# Altium PCB Sensor_PCB.PcbDoc
Units mil, origin at the board's own origin, x right, y up, seen from the top; angles counter-clockwise.
Board outline 6200 x 6200 mil, 2 copper layers (Top Layer, Bottom Layer); 26 components, 17 nets, 100 pads, 228 vias.
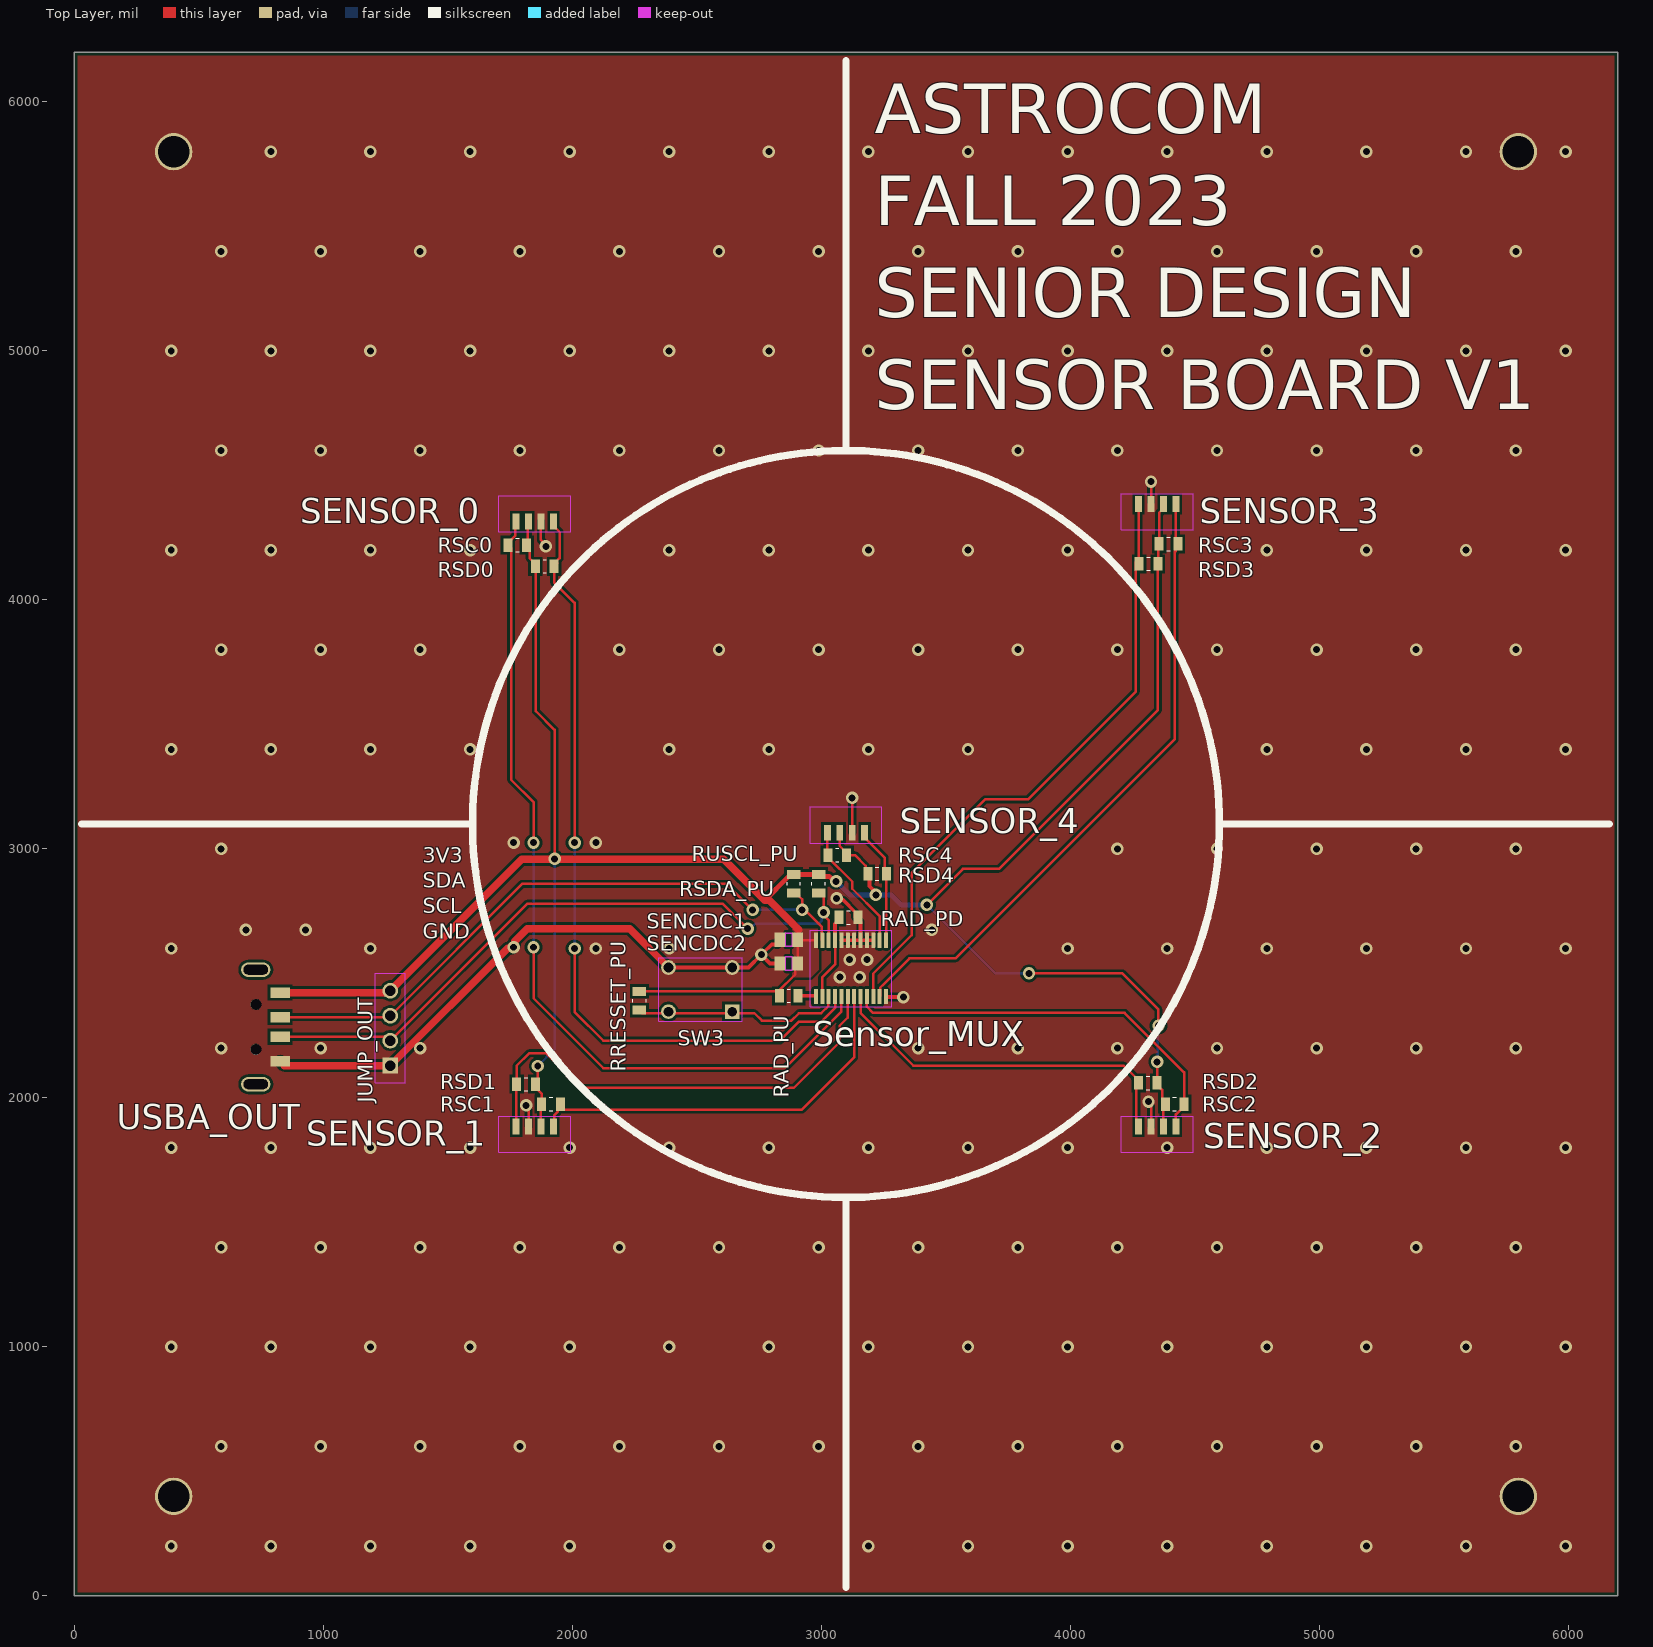
[diagram p0: Top Layer view]
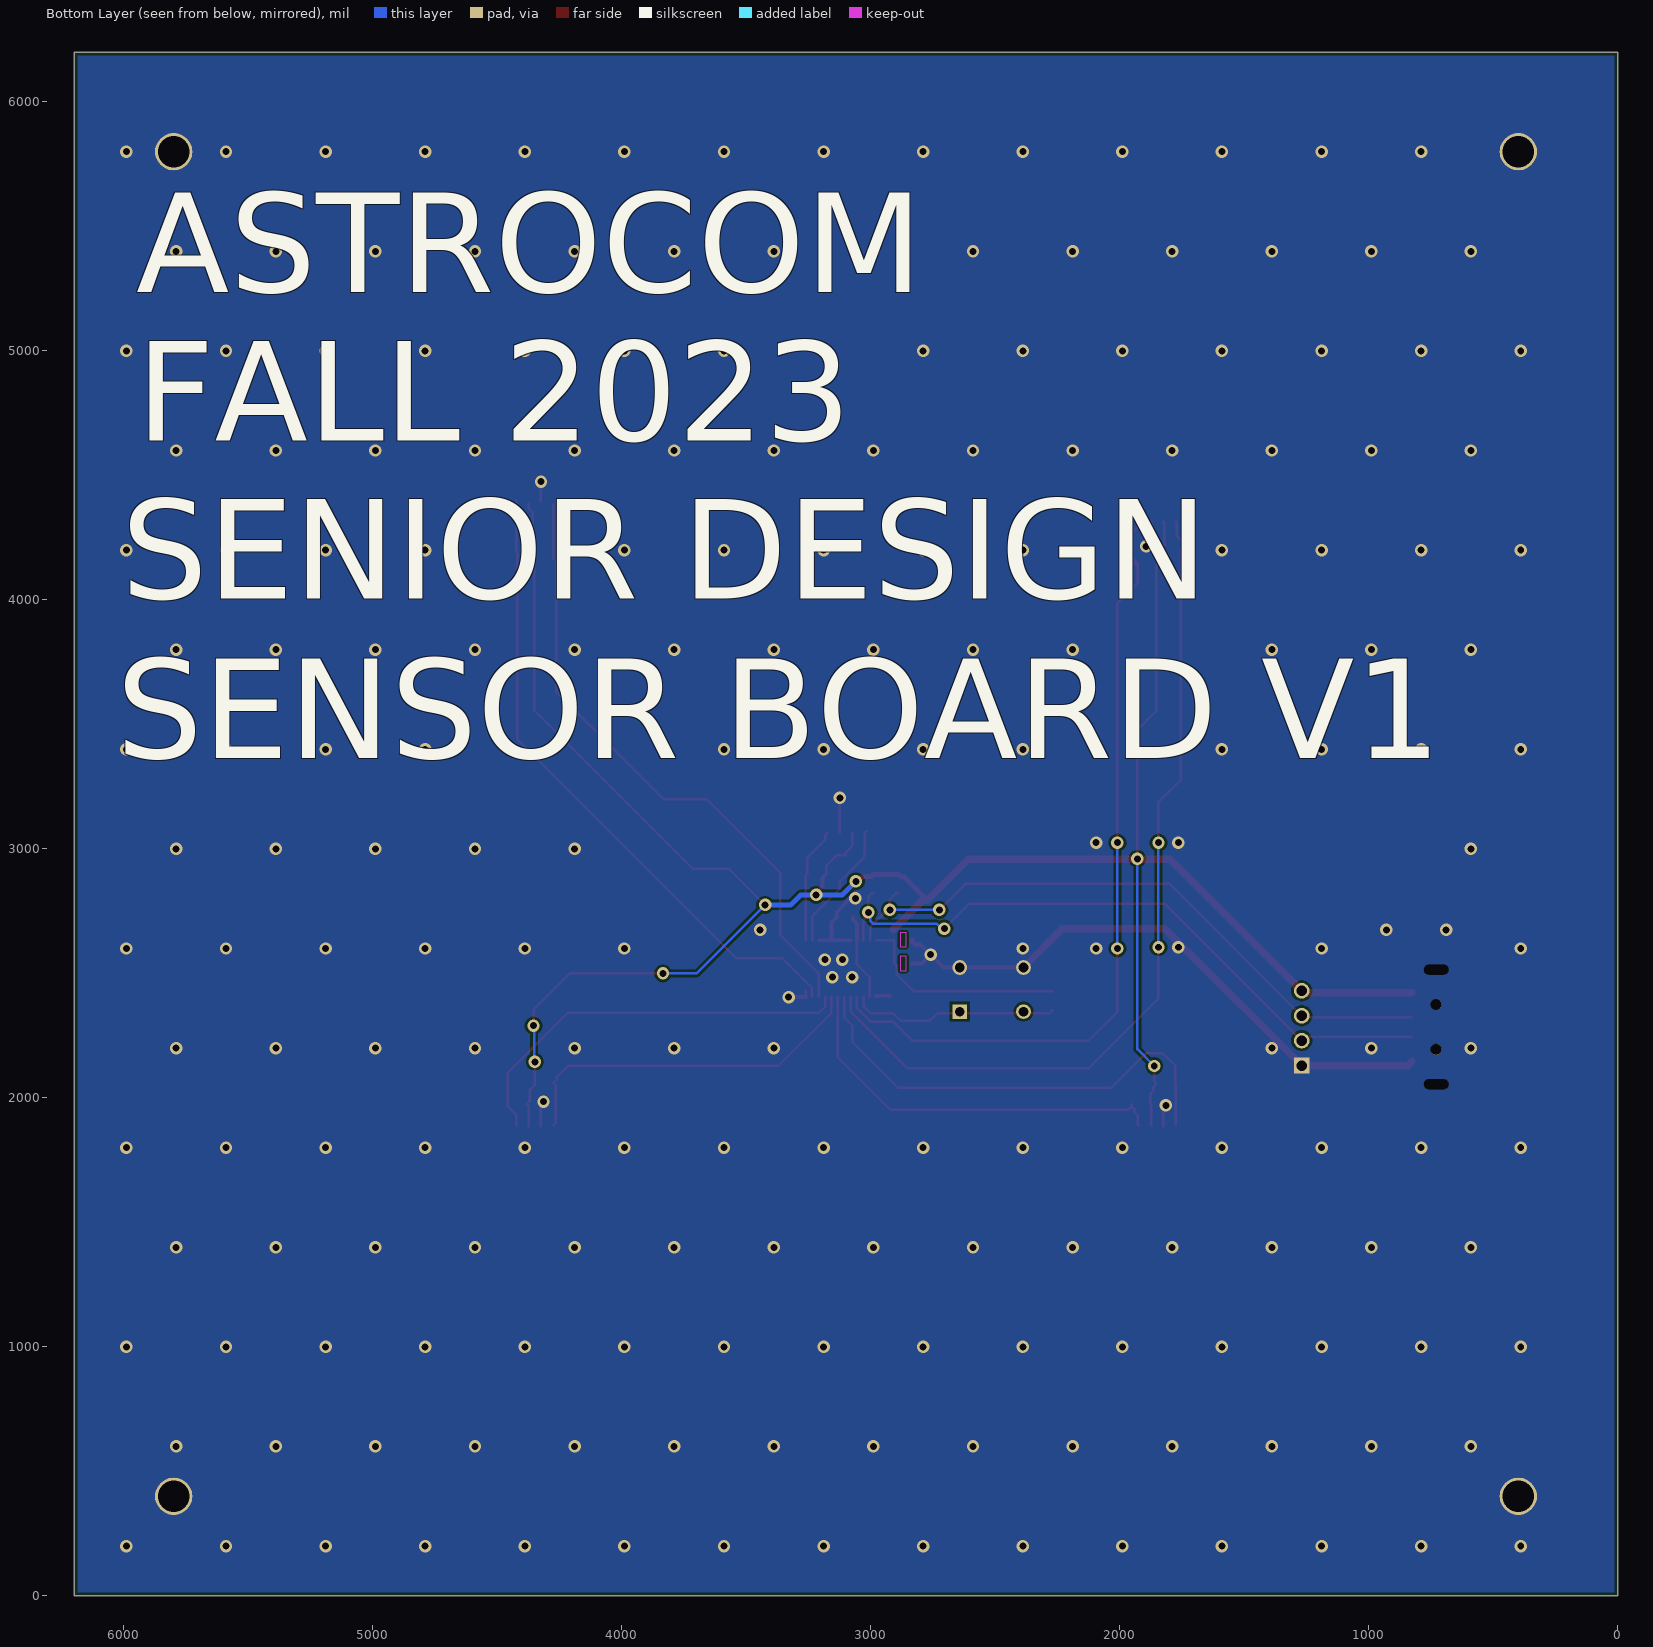
[diagram p1: Bottom Layer view, seen from below]
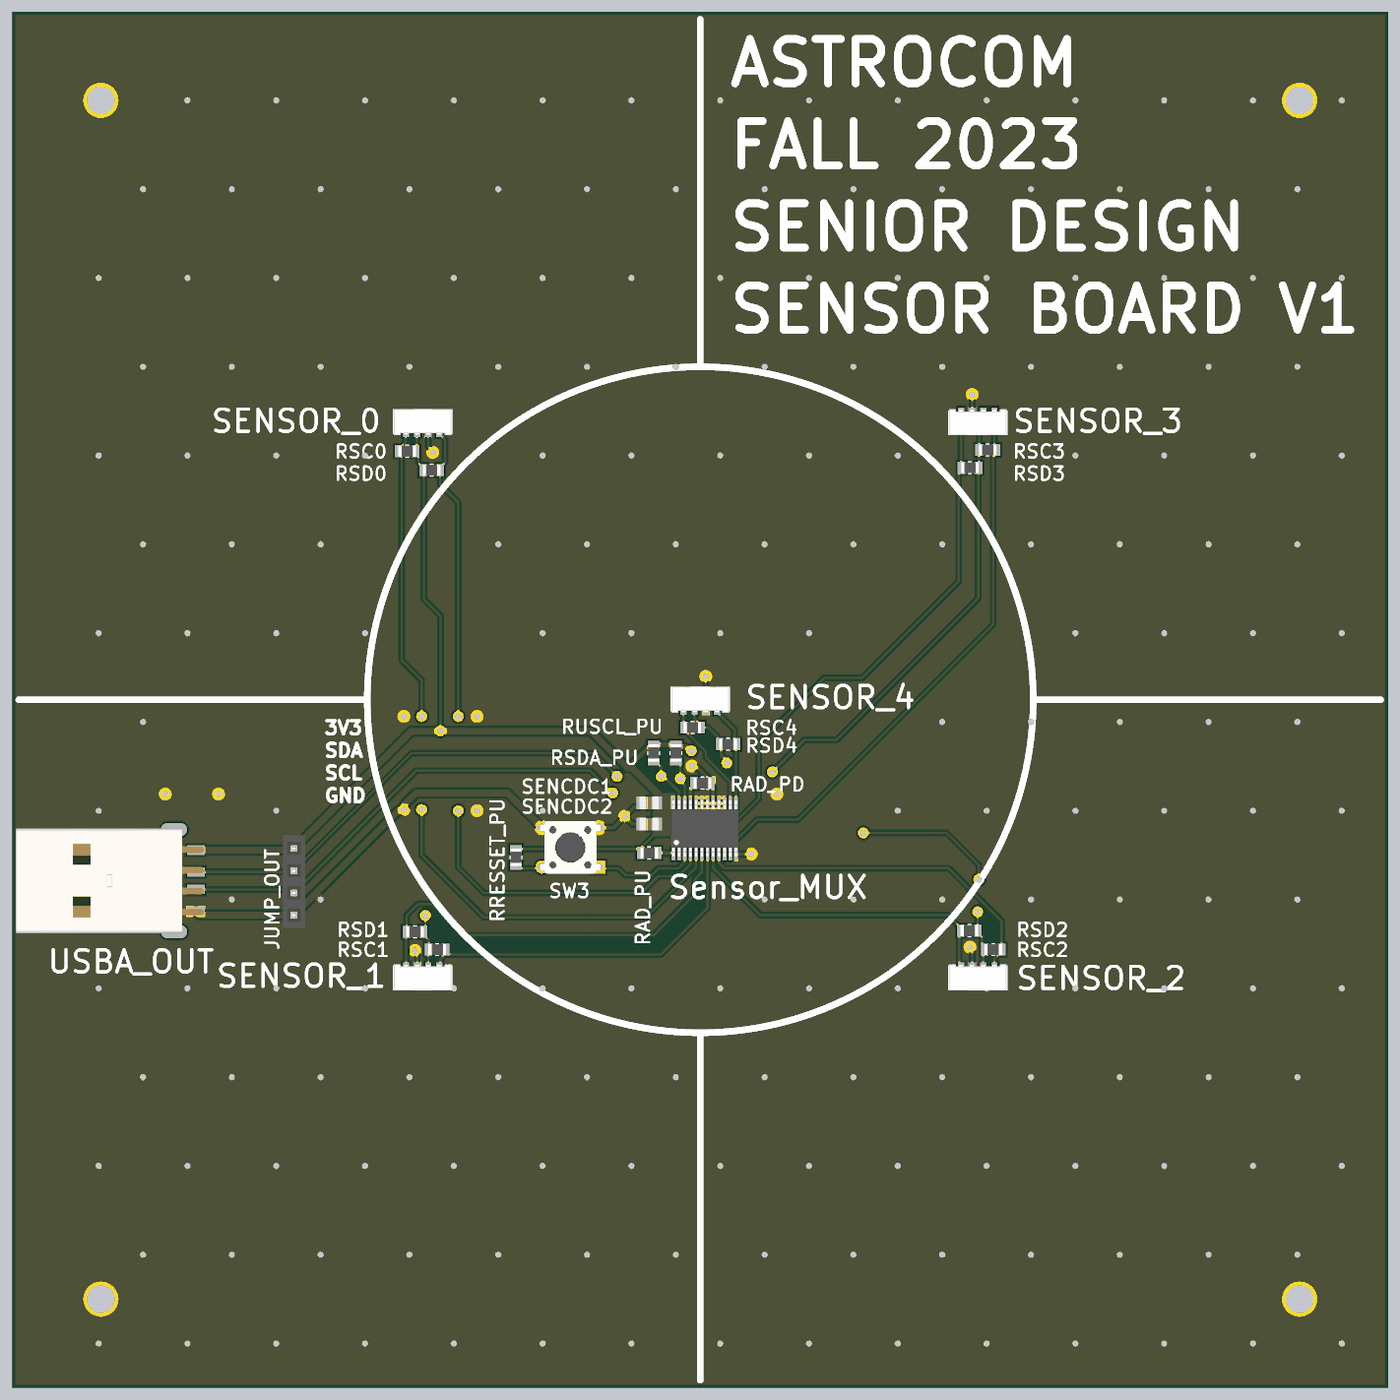
[diagram p2: 3D render of the assembled board from above, using the file's embedded part models]

## Layer stack, top to bottom
Top Solder: solder mask 0.4, Solder Resist, Dk 3.5
Top Layer: signal copper 1.4
Dielectric 1: dielectric 12.6, FR-4, Dk 4.8
Bottom Layer: signal copper 1.4
Bottom Solder: solder mask 0.4, Solder Resist, Dk 3.5

## Board outline
0,0 0,6200 6200,6200 6200,0

## Design rules (kind name [scope] priority, off if disabled: settings)
BoardOutlineClearance [All] p1: gap=10 ignorepadtopadclearanceinfootprint=FALSE except(0: Arc-SplitContinuation Track-SplitContinuation SMDPad-SplitContinuation THPad-SplitContinuation Via-SplitContinuation Fill-SplitContinuation Poly-SplitContinuation Region-SplitContinuation Text-SplitContinuation; 15: Poly-OutlineEdge Poly-CavityEdge Poly-CutoutEdge Poly-SplitBarrior)
Clearance Clearance_1 [All] p1: gap=10 ignorepadtopadclearanceinfootprint=FALSE except(0: Arc-Hole Track-Hole SMDPad-Hole THPad-Hole Via-Hole Fill-Hole Poly-Hole Region-Hole Text-Hole)
Clearance [All] p2: gap=10 ignorepadtopadclearanceinfootprint=FALSE except(0: Arc-Hole Track-Hole SMDPad-Hole THPad-Hole Via-Hole Fill-Hole Poly-Hole Region-Hole Text-Hole)
HoleSize [All] p1: absolutevalues=TRUE maxlimit=200 minlimit=1 maxpercent=80.000 minpercent=20.000
PolygonConnect [All] p1: connectstyle=Direct reliefconductorwidth=10 reliefentries=4 polygonreliefangle="90 Angle" airgapwidth=10
RoutingVias [All] p1: holewidth=28 width=50 viastyle="Through Hole" minholewidth=28 minwidth=50 maxholewidth=28 maxwidth=50
SolderMaskExpansion [All] p1: expansion=4 istentingtop=FALSE
Width [All] p1: maxlimit=30 minlimit=6 preferedwidth=10 minimp=50.000000 maximp=50.000000 favimp=50.000000
29 further rules are at their usual default settings.

## Components (designator, comment, footprint, x,y, rotation, side; value= is the part's Value field where it differs from the comment)
JUMP_OUT "PPTC041LFBN-RC" SULLINS_PPTC041LFBN-RC 1270,2280 r90 top
RAD_PD "2.2k Ohms" RESC2012X60N 3110,2725 r180 top
RAD_PU "2.2k Ohms" RESC2012X60N 2870,2410 r180 top
RRESSET_PU "2.2k Ohms" RESC2012X60N 2270,2390 r90 top
RSC0 "2.2k Ohms" RESC2012X60N 1780,4220 r0 top
RSC1 "2.2k Ohms" RESC2012X60N 1915,1975 r180 top
RSC2 "2.2k Ohms" RESC2012X60N 4420,1975 r180 top
RSC3 "2.2k Ohms" RESC2012X60N 4395,4225 r180 top
RSC4 "2.2k Ohms" RESC2012X60N 3065,2975 r0 top
RSD0 "2.2k Ohms" RESC2012X60N 1890,4135 r180 top
RSD1 "2.2k Ohms" RESC2012X60N 1815,2055 r0 top
RSD2 "2.2k Ohms" RESC2012X60N 4312.4,2060 r0 top
RSD3 "2.2k Ohms" RESC2012X60N 4315,4145 r0 top
RSD4 "2.2k Ohms" RESC2012X60N 3225,2900 r180 top
RSDA_PU "2.2k Ohms" RESC2012X60N 2890,2860 r90 top
RUSCL_PU "2.2k Ohms" RESC2012X60N 2990,2860 r90 top
SENCDC1 "200pF" CAP_CC0805_YAG 2870,2635 r0 top
SENCDC2 "200pF" CAP_CC0805_YAG 2870,2540 r0 top
SENSOR_0 "VEML7700-TT" XDCR_VEML7700-TT 1850,4350 r90 top
SENSOR_1 "VEML7700-TT" XDCR_VEML7700-TT 1850,1850 r270 top
SENSOR_2 "VEML7700-TT" XDCR_VEML7700-TT 4350,1850 r270 top
SENSOR_3 "VEML7700-TT" XDCR_VEML7700-TT 4350,4350 r270 top
SENSOR_4 "VEML7700-TT" XDCR_VEML7700-TT 3100,3100 r90 top
Sensor_MUX "TCA9548APWR" SOP65P640X120-24N 3120,2520 r90 top
SW3 "1825910-6" SW_1825910-6-4 2515,2435 r180 top
USBA_OUT "USB-AP-S-RA-SMT" CONN_USB-AP-S-RA-SMT_ADM 440,2285 r270 top

## Footprints (in the part's own frame and the unit in brackets; to place one, negate y for a bottom-side part, rotate by r counter-clockwise, add the part's x,y. Pads: shape width x height; smd on the part's side, far side on the other; paste and mask are expansions set on the pad)
CAP_CC0805_YAG [mil]
  rect 44x57 smd paste+0 mask+0: 1(-35.31,0) 2(35.31,0)
  Top Layer keep-out region: -11.31,-26.5 -11.31,26.5 11.31,26.5 11.31,-26.5
  Keep-Out Layer region: -11.31,-28.5 -11.31,28.5 11.31,28.5 11.31,-28.5
  body extent -43,-29 43,29, height 57
CONN_USB-AP-S-RA-SMT_ADM [mil]
  rect 43x79 smd: 1(-137.8,387.5) 2(-39.37,387.5) 3(39.37,387.5) 4(137.8,387.5)
  round 43 hole 43: 5(-90,290) 6(90,290)
  rrect100% 59x118 smd: 7(-230,289.5) 8(230,289.5)
  round 39 hole 39 slot 98 at 90 deg: S_1_H1(-230,289.5) S_2_H1(230,289.5)
  body extent -245,-422 245,425, height 176
RESC2012X60N [mm]
  rect 0.92x1.38 smd: 1(-0.955,0) 2(0.955,0)
  silkscreen extent -0.17,-0.68 0.17,0.68, body extent -1,-0.63 1,0.63, height 0.6
SOP65P640X120-24N [mil]
  rrect25% 61.81x16.14 smd: 1(-112.99,140.75) 2(-112.99,115.16) 3(-112.99,89.57) 4(-112.99,63.98) 5(-112.99,38.39) 6(-112.99,12.8) 7(-112.99,-12.8) 8(-112.99,-38.39) 9(-112.99,-63.98) 10(-112.99,-89.57) 11(-112.99,-115.16) 12(-112.99,-140.75) 13(112.99,-140.75) 14(112.99,-115.16) 15(112.99,-89.57) 16(112.99,-63.98) 17(112.99,-38.39) 18(112.99,-12.8) 19(112.99,12.8) 20(112.99,38.39) 21(112.99,63.98) 22(112.99,89.57) 23(112.99,115.16) 24(112.99,140.75)
  Top Layer keep-out lines w1.97: -153.74,163.39 153.74,163.39 153.74,-163.39 -153.74,-163.39 -153.74,163.39
  body extent -126,-154 126,154, height 47
SULLINS_PPTC041LFBN-RC [mil]
  rect 63.2x63.2 / inner round 58.38 / far side rect 63.2x63.2 hole 42.13: 1(-150,0)
  round 63.2 hole 42.13: 2(-50,0) 3(50,0) 4(150,0)
  Top Layer keep-out lines w1.97: -219.69,59.84 -219.69,-59.84 219.69,-59.84 219.69,59.84 -219.69,59.84
  body extent -210,-50 210,50, height 335
SW_1825910-6-4 [mil]
  rect 58.98x58.98 / inner round 54.49 / far side rect 58.98x58.98 hole 38.98: 1(-127.95,88.58)
  round 58.98 hole 38.98: 2(127.95,88.58) 3(-127.95,-88.58) 4(127.95,-88.58)
  Top Layer keep-out lines w1.97: 167.32,127.95 -167.32,127.95 -167.32,-127.95 167.32,-127.95 167.32,127.95
  body extent -153,-118 154,118, height 197
XDCR_VEML7700-TT [mil]
  rect 62.99x27.56 smd: 1(-35.43,75) 2(-35.43,25) 3(-35.43,-25) 4(-35.43,-75)
  Top Layer keep-out lines w1.97: -76.77,143.7 -76.77,-143.7 68.9,-143.7 68.9,143.7 -76.77,143.7
  body extent -59,-134 59,134, height 92

## Part data
JUMP_OUT: "4 Position Header Connector Through Hole  Check availability", PACKAGE=None, AVAILABILITY="In Stock", CHECK_PRICES=https://www.snapeda.com/parts/PPTC041LFBN-RC/Sullins+Connector+Solutions/view-part/?ref=eda, DeviceSetName=PPTC041LFBN-RC, GateName_1=G$1, LibraryName=PPTC041LFBN-RC, MF="Sullins Connector", MP=PPTC041LFBN-RC, PRICE=None, PURCHASE-URL="https://www.snapeda.com/api/url_track_click_mouser/?unipart_id=285917&manufacturer=Sullins Connector&part_name=PPTC041LFBN-RC&search_term=pptc041lfbn-rc", SNAPEDA_LINK=https://www.snapeda.com/parts/PPTC041LFBN-RC/Sullins+Connector+Solutions/view-part/?ref=snap, SymbolName_1=PPTC041LFBN-RC
RAD_PD RAD_PU RRESSET_PU RSC0 RSC1 RSC2 RSC3 RSC4 RSD0 RSD1 RSD2 RSD3 RSD4 RSDA_PU RUSCL_PU: library part AC0805FR-072K2L, "RES SMD 2.2K OHM 1% 1/8W 0805", PACKAGE=None, AVAILABILITY=Unavailable, MP=AC0805FR-072K2L, PRICE=None
SENCDC1 SENCDC2: library part CC0805KRX7R9BB201, "CAP CER 200PF 50V X7R 0805", MFR_NAME=Yageo, COPYRIGHT="Copyright (C) 2023 Ultra Librarian. All rights reserved.", MANUFACTURER_PART_NUMBER=CC0805KRX7R9BB201, RefDes=RefDes, TYPE=DEV
SENSOR_0 SENSOR_1 SENSOR_2 SENSOR_3 SENSOR_4: PACKAGE=XDCR_VEML7700-TT, AVAILABILITY="In Stock", CHECK_PRICES=https://www.snapeda.com/parts/VEML7700-TT/Vishay+Semiconductor+Opto+Division/view-part/?ref=eda, DeviceSetName=VEML7700-TT, GateName_1=G$1, LibraryName=VEML7700-TT, MF="Vishay Semiconductor", MP=VEML7700-TT, PRICE=None, PURCHASE-URL="https://www.snapeda.com/api/url_track_click_mouser/?unipart_id=534245&manufacturer=Vishay Semiconductor&part_name=VEML7700-TT&search_term=veml7700", SNAPEDA_LINK=https://www.snapeda.com/parts/VEML7700-TT/Vishay+Semiconductor+Opto+Division/view-part/?ref=snap, SymbolName_1=VEML7700-TT
Sensor_MUX: "IC BUS SWITCH 1 X 8:1 24TSSOP", PACKAGE=SOP65P640X120-24N, AVAILABILITY="In Stock", CHECK_PRICES=https://www.snapeda.com/parts/TCA9548APWR/Texas+Instruments/view-part/?ref=eda, DeviceSetName=TCA9548APWR, GateName_1=G$1, LibraryName=TCA9548APWR, MF="Texas Instruments", MP=TCA9548APWR, PRICE=None, PURCHASE-URL="https://www.snapeda.com/api/url_track_click_mouser/?unipart_id=280817&manufacturer=Texas Instruments&part_name=TCA9548APWR&search_term=tca9548a", SNAPEDA_LINK=https://www.snapeda.com/parts/TCA9548APWR/Texas+Instruments/view-part/?ref=snap, SymbolName_1=TCA9548APWR
SW3: "SWITCH TACTILE SPST-NO 0.05A 24V", PACKAGE=SW_1825910-6-4, AVAILABILITY="In Stock", CHECK_PRICES=https://www.snapeda.com/parts/1825910-6/TE+Connectivity+ALCOSWITCH+Switches/view-part/?ref=eda, DeviceSetName=1825910-6, GateName_1=G$1, LibraryName=1825910-6, MF="TE Connectivity", MP=1825910-6, PRICE=None, PURCHASE-URL="https://www.snapeda.com/api/url_track_click_mouser/?unipart_id=226996&manufacturer=TE Connectivity&part_name=1825910-6&search_term=1825910-6", SNAPEDA_LINK=https://www.snapeda.com/parts/1825910-6/TE+Connectivity+ALCOSWITCH+Switches/view-part/?ref=snap, SymbolName_1=1825910-6
USBA_OUT: "USB A 2.0, R/A, SMT, PLUG", MFR_NAME="ADAM TECHNOLOGIES INC", PACKAGE=CONN_USB-AP-S-RA-SMT_ADM, COPYRIGHT="Copyright (C) 2023 Ultra Librarian. All rights reserved.", DeviceSetName=USB-AP-S-RA-SMT, GateName_1=A, LibraryName=USB-AP-S-RA-SMT, MANUFACTURER_PART_NUMBER=USB-AP-S-RA-SMT, SymbolName_1=CONN_004P_000C_1

## Free pads (board coordinates)
  round 150 hole 126: MH1(400,5800) MH2(5800,5800) MH3(400,400) MH4(5800,400)

## Via types
v1: diameter 50, hole 28, Top Layer to Bottom Layer, 228 vias

## Nets (pads, with @x,y where several pads share a name; then routed paths per layer and width w, separated by ;. In a path a pad name is that pad's centre, name@x,y a point inside that pad or via, vN(x,y) a via of type N, cw(c..) or ccw(c..) an arc to the next point about the centre after c; other vN are vias at no path point)
3.3VOUTCON: JUMP_OUT.4 RAD_PU.2 RRESSET_PU.2 RSC0.2 RSC1.2 RSC2.2 RSC3.2 RSC4.2 RSD0.2 RSD1.2 RSD2.2 RSD3.2 RSD4.2 RSDA_PU.2 RUSCL_PU.2 SENCDC1.2 SENCDC2.2 SENSOR_0.2 SENSOR_1.2 SENSOR_2.2 SENSOR_3.2 SENSOR_4.2 Sensor_MUX.24 USBA_OUT.1 | length 10551.9
  Top Layer w10: SENSOR_0.2 1822.4,4311.97 1822.4,4224.8 RSC0.2 1830,4207.6 1830,4166.46 1852.4,4144.06 RSD0.2 1854.8,4132.6 1854.8,3552.92 1930,3477.72 v1(1930,2960) v1@1930,2957.8 ; v1(1862.01,2128) 1862.01,2064.41 RSD1.2 1865.71,2041.89 1865.71,2029.29 1877.4,2017.6 RSC1.2 1875,1972.6 SENSOR_1.2@1875,1890.43 ; RRESSET_PU.2 2827.6,2427.6 2896.31,2496.31 2896.31,2531 SENCDC2.2 SENCDC1.2@2905.31,2632.99 ; SENCDC1.2@2907.32,2632.99 Sensor_MUX.24 ; SENSOR_4.2 3075,3011.65 3102.6,2984.06 RSC4.2 3135.71,2975 3179.29,2931.42 RSD4.2@3179.29,2900 ; v1(3425,2775) 3569.48,2919.48 3714.48,2919.48 4352.6,3557.6 RSD3.2 ; v1(3835,2500) 4210,2500 4355,2355 v1(4355,2290) ; v1(4350,2145) RSD2.2 4350,2050.94 4363.11,2037.83 4363.43,2037.83 4369.29,2031.98 4369.29,1988.11 RSC2.2 4375,1967.6 SENSOR_2.2 ; RSD3.2@4355,4147.4 RSC3.2@4355,4222.6 ; RSC3.2 4357.4,4350.12 4375,4367.72 SENSOR_3.2
  Top Layer w15: RSD4.2@3179.29,2900 3194.14,2885.15 3194.14,2850.33 3220,2824.47 v1(3220,2815) ; RSD3.2 RSD3.2@4355,4147.4 ; RSC3.2@4355,4222.6 RSC3.2
  Top Layer w20: 2773.01,2793.01 2869.49,2889.49 2881.89,2889.49 RSDA_PU.2 ; RSDA_PU.2@2899.06,2897.6 RUSCL_PU.2 2998.11,2889.49 3032.39,2889.49 3051.88,2870 v1(3060,2870)
  Top Layer w30: USBA_OUT.1 JUMP_OUT.4@1270,2422.8 ; JUMP_OUT.4 1797.8,2957.8 1930,2957.8 2608.22,2957.8 2761.06,2804.96 2773.01,2793.01 2791.99,2793.01 2910,2675
  Bottom Layer w10: v1(1862.01,2128) 1930,2195.99 v1(1930,2960) ; v1(3425,2775) 3700,2500 v1(3835,2500) ; v1(4350,2145) 4352.5,2147.5 4352.5,2287.5 v1(4355,2290)
  Bottom Layer w20: v1(3060,2870) 3115,2815 v1(3220,2815) 3282.13,2815 3322.13,2775 v1(3425,2775)
GND: JUMP_OUT.1 pad.MH1 pad.MH2 pad.MH3 pad.MH4 RAD_PD.1 SENCDC1.1 SENCDC2.1 SENSOR_0.3 SENSOR_1.3 SENSOR_2.3 SENSOR_3.3 SENSOR_4.3 Sensor_MUX.12 Sensor_MUX.15 Sensor_MUX.16 Sensor_MUX.17 Sensor_MUX.18 Sensor_MUX.19 Sensor_MUX.20 SW3.3 SW3.4 USBA_OUT.4 | length 3420.4
  Top Layer w10: v1(1815,1970) 1815,1959.18 1825,1949.18 SENSOR_1.3 ; SENSOR_0.3 1875,4240.86 1895,4220.86 v1(1895,4215) ; v1(2760,2575) v1@2767.65,2582.65 ; SENCDC2.1@2834.69,2539.69 SENCDC2.1@2835,2539.69 ; SENSOR_4.3 v1(3125,3205) ; Sensor_MUX.12 Sensor_MUX.12@3260.75,2429.85 ; v1(4315,1985) 4315,1974.18 4325.38,1963.8 SENSOR_2.3@4325.38,1885.81 ; SENSOR_3.3@4325,4395.43 v1(4325,4475)
  Top Layer w15: SW3.4 SW3.3 2708.58,2523.58 v1(2760,2575) 2795,2540 2834.39,2540 SENCDC2.1@2834.69,2539.69 ; v1@2767.65,2582.65 2801.5,2616.5 SENCDC1.1@2822.69,2616.5 ; v1(3062.47,2801.05) 3071.94,2801.05 3078.69,2794.3 3088.56,2794.3 3136.99,2745.87 3136.99,2726.56 3158.39,2705.15 Sensor_MUX.17 ; Sensor_MUX.20 Sensor_MUX.19 Sensor_MUX.18 Sensor_MUX.17 ; Sensor_MUX.15 Sensor_MUX.16 Sensor_MUX.17 ; Sensor_MUX.12 3260.75,2405.57 3261.32,2405 v1(3330,2405)
  Top Layer w20: SENCDC1.1@2822.69,2616.5 2834.69,2628.5 SENCDC1.1
  Top Layer w30: USBA_OUT.4 844.7,2130 JUMP_OUT.1 1741.17,2601.17 1755.76,2601.17 1758.47,2603.88 1758.47,2611.53 1766.12,2611.53 1768.83,2614.24 1768.83,2628.83 1820,2680 2230.63,2680 SW3.4
  other v1: 390,200 790,200 1190,200 1590,200 1990,200 2390,200 2790,200 3190,200 3590,200 3990,200 4390,200 4790,200 5190,200 5590,200 5990,200 590,600 990,600 1390,600 1790,600 2190,600 2590,600 2990,600 3390,600 3790,600 4190,600 4590,600 4990,600 5390,600 5790,600 390,1000 790,1000 1190,1000 1590,1000 1990,1000 2390,1000 2790,1000 3190,1000 3590,1000 3990,1000 4390,1000 4790,1000 5190,1000 5590,1000 5990,1000 590,1400 990,1400 1390,1400 1790,1400 2190,1400 2590,1400 2990,1400 3390,1400 3790,1400 4190,1400 4590,1400 4990,1400 5390,1400 5790,1400 390,1800 790,1800 1190,1800 1590,1800 1990,1800 2390,1800 2790,1800 3190,1800 3590,1800 3990,1800 4390,1800 4790,1800 5190,1800 5590,1800 5990,1800 590,2200 990,2200 1390,2200 3390,2200 3790,2200 4190,2200 4590,2200 4990,2200 5390,2200 5790,2200 3075,2485 3155,2485 3115,2555 3185,2555 390,2600 1190,2600 2095,2600 2390,2600 3990,2600 4390,2600 4790,2600 5190,2600 5590,2600 5990,2600 1765,2605 690,2675 930,2675 3445,2675 590,3000 4190,3000 4590,3000 4990,3000 5390,3000 5790,3000 1765,3025 2095,3025 390,3400 790,3400 1190,3400 1590,3400 2390,3400 2790,3400 3190,3400 3590,3400 4790,3400 5190,3400 5590,3400 5990,3400 590,3800 990,3800 1390,3800 2190,3800 2590,3800 2990,3800 3390,3800 3790,3800 4190,3800 4590,3800 4990,3800 5390,3800 5790,3800 390,4200 790,4200 1190,4200 1590,4200 2390,4200 2790,4200 3190,4200 3590,4200 3990,4200 4790,4200 5190,4200 5590,4200 5990,4200 590,4600 990,4600 1390,4600 1790,4600 2190,4600 2590,4600 2990,4600 3390,4600 3790,4600 4190,4600 4590,4600 4990,4600 5390,4600 5790,4600 390,5000 790,5000 1190,5000 1590,5000 1990,5000 2390,5000 2790,5000 3190,5000 3590,5000 3990,5000 4390,5000 4790,5000 5190,5000 5590,5000 5990,5000 590,5400 990,5400 1390,5400 1790,5400 2190,5400 2590,5400 2990,5400 3390,5400 3790,5400 4190,5400 4590,5400 4990,5400 5390,5400 5790,5400 790,5800 1190,5800 1590,5800 1990,5800 2390,5800 2790,5800 3190,5800 3590,5800 3990,5800 4390,5800 4790,5800 5190,5800 5590,5800 5990,5800
MUXSC0: RSC0.1 SENSOR_0.1 Sensor_MUX.5 | length 3477.4
  Top Layer w10: SENSOR_0.1 1772.4,4311.97 1772.4,4259.06 1742.4,4229.06 RSC0.1 1755,4207.4 1755,3277.59 1845,3187.59 v1(1845,3025) ; v1(1845,2605) 1845,2400 2125,2120 2855,2120 3081.61,2346.61 Sensor_MUX.5
  Bottom Layer w10: v1(1845,2605) v1(1845,3025)
MUXSC1: RSC1.1 SENSOR_1.1 Sensor_MUX.7 | length 1612.8
  Top Layer w10: SENSOR_1.1@1925,1890.43 1928.86,1894.29 1928.86,1931.07 1941.49,1943.69 1941.49,1954.83 RSC1.1@1952.6,1965.94 ; RSC1.1 RSC1.1@1952.6,1965.94 ; Sensor_MUX.7 3132.8,2162.8 2922.83,1952.83 1965.71,1952.83 RSC1.1@1952.6,1965.94
MUXSC2: RSC2.1 SENSOR_2.1 Sensor_MUX.9 | length 1649.7
  Top Layer w10: Sensor_MUX.9 3183.98,2366.02 3208.9,2341.1 4218.9,2341.1 4457.6,2102.4 4457.6,1965.94 4425,1933.35 SENSOR_2.1@4425,1890
MUXSC3: RSC3.1 SENSOR_3.1 Sensor_MUX.11 | length 2592.5
  Top Layer w10: Sensor_MUX.11 3237.68,2409.53 3237.68,2442.95 3247.65,2452.91 3247.91,2452.91 3355,2560 3540,2560 4280.16,3300.16 4419.49,3439.49 4419.49,4195 ; 4425,4195 4425,4215 4425,4225 SENSOR_3.1 SENSOR_3.1@4425,4400.43
MUXSC4: RSC4.1 SENSOR_4.1 Sensor_MUX.14 | length 520.8
  Top Layer w10: SENSOR_4.1@3016.22,3071.72 SENSOR_4.1@3024.18,3063.75 ; SENSOR_4.1 3025,2977.4 RSC4.1 ; RSC4.1@3027.4,2965.94 3125,2868.35 3125,2840 3235.16,2729.84 Sensor_MUX.14
MUXSD0: RSD0.1 SENSOR_0.4 Sensor_MUX.4 | length 3222.6
  Top Layer w10: SENSOR_0.4@1922.4,4300 1922.4,4299.45 1933.78,4288.07 1934.33,4288.07 1950,4272.4 1950,4168.02 1927.6,4145.62 RSD0.1 ; RSD0.1@1940.71,4148.11 RSD0.1 ; v1(2010,2600) 2010,2345 2125,2230 2835,2230 2910,2305 3000,2305 3056.02,2361.02 Sensor_MUX.4 ; v1(2010,3025) 2010,3988.09 1927.6,4070.49 RSD0.1
  Bottom Layer w10: v1(2010,2600) v1(2010,3025)
MUXSD1: RSD1.1 SENSOR_1.4 Sensor_MUX.6 | length 1888.2
  Top Layer w10: SENSOR_1.4@1775,1890.43 1775,2052.6 RSD1.1 1777.4,2128.97 1828.43,2180 1895,2180 2035,2040 2890,2040 3075,2225 3075,2290 3107.2,2322.2 Sensor_MUX.6
MUXSD2: RSD2.1 SENSOR_2.4 Sensor_MUX.8 | length 1481.6
  Top Layer w10: Sensor_MUX.8 3158.39,2341.61 3370,2130 4215,2130 4261.69,2083.31 4261.69,2073.11 RSD2.1 4266.22,2051.42 4266.22,1898.78 SENSOR_2.4@4275,1890
MUXSD3: RSD3.1 SENSOR_3.4 Sensor_MUX.10 | length 2503.2
  Top Layer w10: Sensor_MUX.10 3209.57,2499.57 3363.37,2653.37 3363.37,2903.37 3659,3199 3830.45,3199 4264.29,3632.83 4264.29,4115 4264.29,4135 4264.29,4145 RSD3.1@4264.29,4151.89 ; SENSOR_3.4@4275,4385 4275,4167.4 RSD3.1@4277.4,4165
MUXSD4: RSD4.1 SENSOR_4.4 Sensor_MUX.13 | length 467.3
  Top Layer w10: SENSOR_4.4 3183.78,3055.79 3183.78,3036.22 3255,2965 3255,2900 3260.98,2894.02 3260.98,2860.74 3260.75,2860.51 Sensor_MUX.13
NetRAD_PD_2: RAD_PD.2 Sensor_MUX.2 Sensor_MUX.21 | length 346
  Top Layer w10: Sensor_MUX.2 3004.84,2484.84 3056.02,2536.02 Sensor_MUX.21
  Top Layer w15: Sensor_MUX.21 3056.02,2699.56 3072.4,2715.94 RAD_PD.2
NetRAD_PU_1: RAD_PU.1 Sensor_MUX.1 | length 59.3
  Top Layer w15: RAD_PU.1@2922.6,2410 2978.68,2410 2979.25,2409.43 Sensor_MUX.1
NetRRESSET_PU_1: RRESSET_PU.1 Sensor_MUX.3 SW3.1 SW3.2 | length 839.6
  Top Layer w10: RRESSET_PU.1 2282.4,2340 2732.21,2340 2762.21,2310 2880.74,2310 2910.74,2340 3000,2340 3029.22,2369.22 3029.22,2405.8 Sensor_MUX.3
SCL_IN: JUMP_OUT.2 RUSCL_PU.1 Sensor_MUX.22 USBA_OUT.3 | length 2711.3
  Top Layer w10: USBA_OUT.3 1254.37,2245.63 JUMP_OUT.2 1820.63,2780.63 2604.37,2780.63 v1(2705,2680) ; RUSCL_PU.1 2996.89,2822.4 3010,2809.29 v1(3010,2745) 3010,2734.18 3030.43,2713.75 Sensor_MUX.22
  Bottom Layer w10: v1(2705,2680) 2715.82,2680 2735.82,2700 2991.36,2700 3002.35,2710.99 3002.35,2737.35 v1(3010,2745)
SDA_IN: JUMP_OUT.3 RSDA_PU.1 Sensor_MUX.23 USBA_OUT.2 | length 2610.1
  Top Layer w10: USBA_OUT.2 1264.37,2324.37 JUMP_OUT.3 1799.37,2859.37 2620.63,2859.37 v1(2725,2755) ; RSDA_PU.1 2899.06,2822.4 2912.17,2809.29 2912.17,2808.88 2924.18,2796.87 v1(2924.18,2755) 2935,2755 3002.32,2687.68 3002.32,2635.51 Sensor_MUX.23
  Bottom Layer w10: v1(2725,2755) v1(2924.18,2755)
pads on no net: USBA_OUT.5 USBA_OUT.6 USBA_OUT.7 USBA_OUT.8 USBA_OUT.S_1_H1 USBA_OUT.S_2_H1

## Polygon pours and split planes (outlines as drawn)
GND on Top Layer "TOP_GND" (solid, remove dead copper, pour order 6): 0,6200 6200,6200 6200,0 0,0
3.3VOUTCON on Top Layer "3.3VOUTCON_L01_P000" (solid, pour order 0): 2885,2485 2960,2485 2990,2515 2990,2680 2885,2680 2885,2675
GND on Bottom Layer "BOT_GND" (solid, pour order 7): 0,6200 6200,6200 6200,0 0,0

## Silkscreen, mask and mechanical layers (free items; w line width, h text height)
Top Overlay:
  circle w30: c3100,3100 r1500
  lines w30: 30,3100 1600,3100 ; 3100,35 3100,1600 ; 3100,4600 3100,6165 ; 4600,3100 6165,3100
  text "ASTROCOM" at 3215,5875 h200
  text "FALL 2023" at 3215,5505 h200
  text "SENIOR DESIGN" at 3215,5135 h200
  text "SENSOR BOARD V1" at 3215,4765 h200
  text "3V3" at 1400,2945 h60
  text "SDA" at 1400,2843.33 h60
  text "SCL" at 1400,2741.67 h60
  text "GND" at 1400,2640 h60
Bottom Overlay:
  text "ASTROCOM" at 5950,5235 h400
  text "FALL 2023" at 5950,4640 h400
  text "SENIOR DESIGN" at 6010,4005 h400
  text "SENSOR BOARD V1" at 6030,3365 h400

## Text inside footprints (layer, text, board x,y; h text height)
USBA_OUT: Mechanical 18 "Top Row Padstyle:RX43Y79D0T" at -132,2883 h77.5 r270; Mechanical 18 "Middle Row Padstyle: RX43Y79D0T" at -206,2959 h77.5 r270; Mechanical 18 "2nd Middle Row Padstyle: EX55Y55D32P" at -282,3072 h77.5 r270; Mechanical 18 "Bottom Row Padstyle: EX55Y55D32P" at -356,2982 h77.5 r270; Mechanical 18 "Second Bottom Row Padstyle: EX55Y55D32P" at -432,3140 h77.5 r270; Mechanical 18 "Mounting Padstyle: OX43Y43D43P" at -506,2936 h77.5 r270; Mechanical 18 "Second Mounting Padstyle: OX59Y118D0T" at -582,3095 h77.5 r270; Mechanical 18 "Independent Mtg Hole 1 Padstyle: EX96Y96D96P" at -656,3247 h77.5 r270; Mechanical 18 "Independent Mtg Hole 2 Padstyle: EX96Y96D96P" at -732,3247 h77.5 r270; Mechanical 18 "Independent Mtg Hole 3 Padstyle: EX96Y96D96P" at -806,3247 h77.5 r270; Mechanical 18 "Independent Mtg Hole 4 Padstyle: EX96Y96D96P" at -882,3247 h77.5 r270; Mechanical 18 "Alt 1 Padstyle: OX60Y90D30P" at -956,2868 h77.5 r270; Mechanical 18 "Alt 2 Padstyle: OX90Y60D30P" at -1032,2868 h77.5 r270; Mechanical 18 "0.46in/11.684mm" at 1018,2444 h38.75 r270; Mechanical 18 "0.472in/11.989mm" at -57,2455 h38.75 r270; Mechanical 18 "0.823in/20.904mm" at 428,1917 h38.75 r270; Mechanical 18 "0.122in/3.099mm" at 656,1904 h38.75 r270; Mechanical 18 "0.181in/4.597mm" at 949,2444 h38.75 r270; Mechanical 18 "0.098in/2.489mm" at 766,2951 h38.75 r270; Mechanical 7 "*" at 802,2545 h77.5 r270; Mechanical 3 "*" at 802,2545 h77.5 r270